# EAGLE board GW-RFM-V40-Mini007-ok6 (EAGLE 7.6.0)
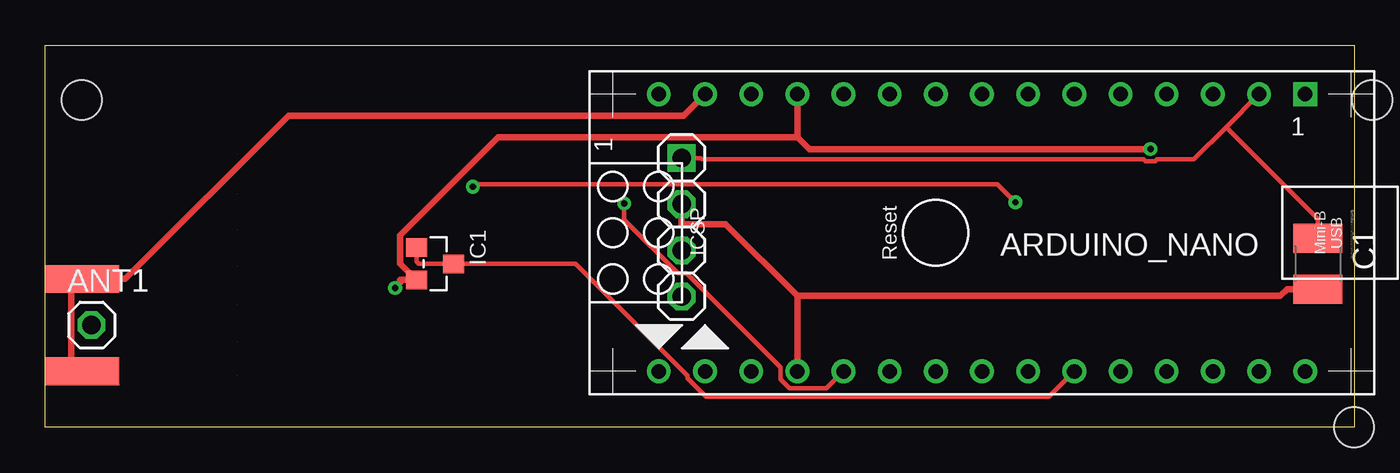
[diagram p0: board, top side]
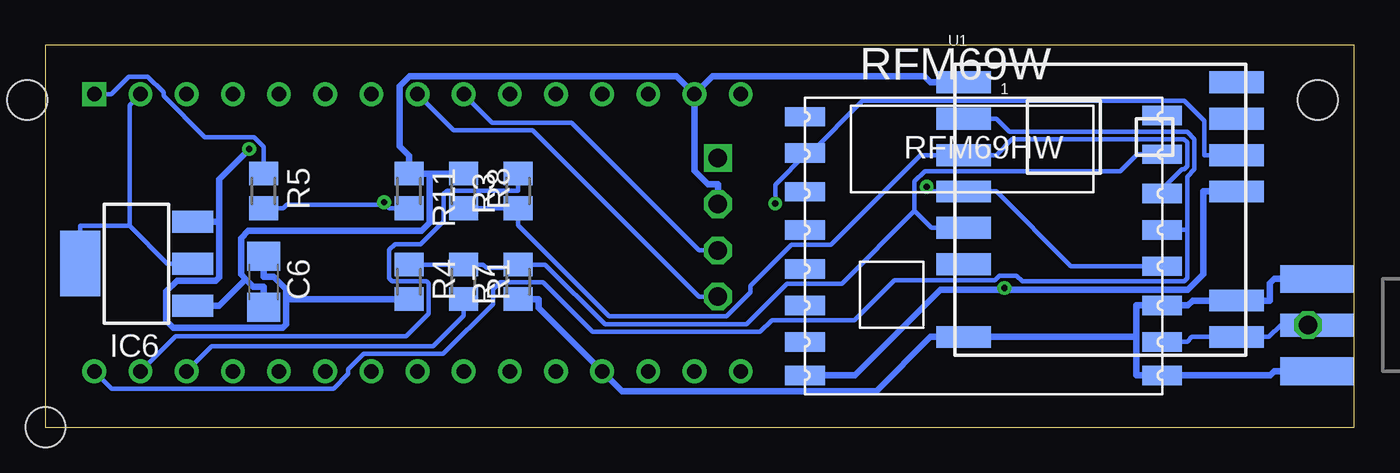
[diagram p1: board, bottom side, seen from below]

Size 72 x 21 mm. Coordinates in mm from the lower left corner, seen from the top.
Outline: 0,0 0,21 72,21 72,0 0,0
Copper layers (1*16): Top 0.035mm / dielectric 1.5mm / Bottom 0.035mm
Design rules "default": minimum track width 6mil, minimum drill 0.35mm, track to track 6mil, track to pad 6mil, pad to pad 6mil, via to via 6mil, smd to smd 6mil, copper to edge 40mil, drill to drill 6mil, minimum pad ring 10mil, minimum via ring 8mil, stop-mask expansion 4mil, vias tented up to drill 0mil, thermal gap 10mil
Net classes: 0 default: width 0.254 mm; 1 Power: width 0.356 mm
Holes 2.2 mm at 2,18 72,0 73,18

## Footprints (pad centres in the part's own frame; a part is rotated, then mirrored left to right if it is on the bottom)
1X01 = drill 1.016 octagon: 1 0,0
ARDUINO_NANO = drill 0.8 square: 1 -20.32,-7.62 | drill 0.8: 2 -17.78,-7.62; 3 -15.24,-7.62; 4 -12.7,-7.62; 5 -10.16,-7.62; 6 -7.62,-7.62; 7 -5.08,-7.62; 8 -2.54,-7.62; 9 0,-7.62; 10 2.54,-7.62; 11 5.08,-7.62; 12 7.62,-7.62; 13 10.16,-7.62; 14 12.7,-7.62; 15 15.24,-7.62; 16 15.24,7.62; 17 12.7,7.62; 18 10.16,7.62; 19 7.62,7.62; 20 5.08,7.62; 21 2.54,7.62; 22 0,7.62; 23 -2.54,7.62; 24 -5.08,7.62; 25 -7.62,7.62; 26 -10.16,7.62; 27 -12.7,7.62; 28 -15.24,7.62; 29 -17.78,7.62; 30 -20.32,7.62
C1210 = smd 1.6 x 2.7: 1 -1.4,0; 2 1.4,0
C1206 = smd 1.6 x 1.8: 1 -1.4,0; 2 1.4,0
SOT23 = smd 1.016 x 1.143: 1 -0.889,-1.016; 2 0.889,-1.016; 3 0,1.016
SOT223 = smd 1.219 x 2.235: 1 -2.311,-3.099; 2 0,-3.099; 3 2.311,-3.099 | smd 3.6 x 2.2: TAB 0,3.099
1X04-S = drill 1.016 square: 1 -3.81,0 | drill 1.016 octagon: 2 -1.27,0; 3 1.27,0; 4 3.81,0
M0805 = smd 1.3 x 1.6: 1 -0.95,0; 2 0.95,0
RFM = smd 2.184 x 1.067: ANT 19.651,2.889; DIO0 0,13.27; DIO1 0,11.143; DIO2 0,9.047; DIO3 0,6.889; DIO4 0,4.889; DIO5 0,2.889; GNDA 19.651,4.889; GNDB 19.651,1.048; MISO 19.651,9.047; MOSI 19.651,11.047; NC 19.651,15.334; NSS 19.651,13.206; RESET 0,15.27; SCK 19.651,7.048; VCC 0,1.048
RFM69HCW-XXXS2 = smd 3 x 1.2: 3.3V 7.5,1; ANT 7.5,-7; DIO0 7.5,3; DIO1 7.5,5; DIO2 7.5,7; GND_1 7.5,-5; GND_2 -7.5,-7; GND_3 -7.5,7; MISO -7.5,5; MOSI -7.5,3; NSS -7.5,-1; RESET -7.5,-3; SCK -7.5,1
SMA_EDGELAUNCH = smd 4.064 x 1.524: GND@1 2.032,-2.54; GND@2 2.032,2.54 | smd 4.064 x 1.524 bottom: GND@3 2.032,2.54; GND@4 2.032,-2.54 | smd 4.064 x 1.27: P 2.032,0

## Placement (x,y rotation side)
ANT1  [1X01]  2.54,5.62 0 top
ARDUINO_NANO  [ARDUINO_NANO]  48.99,10.7 180 top
C1  10uF  [C1210]  70,9 270 top
C6  0.1uF  [C1206]  60,8 270 bottom
IC1  ATSHA204A  [SOT23]  21.44,8.99 270 top
IC6  LM1117MPX-ADJ  [SOT223]  67,9 90 bottom
JP17  [1X04-S]  35,11 270 top
R1  4K7  [M0805]  49,8 270 bottom
R3  4K7  [M0805]  46,13 90 bottom
R4  10k  [M0805]  52,8 270 bottom
R5  4K7  [M0805]  60,13 270 bottom
R7  10K  [M0805]  46,8 90 bottom
R8  10K  [M0805]  49,13 270 bottom
R11  10K  [M0805]  52,13 270 bottom
RFM69W  RFM69HW  [RFM]  30.21,1.81 0 bottom
U1  RFM69HCW  [RFM69HCW-XXXS2]  13.97,11.97 0 bottom
X2  [SMA_EDGELAUNCH]  0,5.62 180 bottom

## Library data of the parts
ANT1 = pinhead
ARDUINO_NANO = ArduinoNanoV30
C1 C6 R1 R3-R5 R7 R8 R11 = rcl
IC1 = Sensor
IC6 = lm1117
JP17 = pinhead-2
RFM69W = hoperf
U1 = doug
X2 = adafruit

## Nets
3V3: ARDUINO_NANO.2 C1.1 IC6.2 IC6.TAB JP17.1
A0: ARDUINO_NANO.4
A1: ARDUINO_NANO.5
A2: ARDUINO_NANO.6
A3: ARDUINO_NANO.7
A4: ARDUINO_NANO.8 JP17.4
A5: ARDUINO_NANO.9 JP17.3
A6: ARDUINO_NANO.10
A7: ARDUINO_NANO.11
ANT: ANT1.1 RFM69W.ANT U1.ANT X2.P
CSN: R1.1 R4.1 R7.2 RFM69W.NSS U1.NSS
D3: ARDUINO_NANO.21
D4: ARDUINO_NANO.22
D5: ARDUINO_NANO.23
D6: ARDUINO_NANO.24
D7/ATSHA: ARDUINO_NANO.25 IC1.1 IC1.3
D8: ARDUINO_NANO.26
D9: ARDUINO_NANO.27
GND [Power]: ARDUINO_NANO.14 ARDUINO_NANO.19 C1.2 C6.2 IC6.1 JP17.2 R7.1 R8.1 R11.1 RFM69W.GNDA RFM69W.GNDB U1.GND_1 U1.GND_2 U1.GND_3 X2.GND@1 X2.GND@2 X2.GND@3 X2.GND@4
IRQ: ARDUINO_NANO.20 RFM69W.DIO0 U1.DIO0
MISO: ARDUINO_NANO.30 RFM69W.MISO U1.MISO
MOSI: R3.1 R8.2 RFM69W.MOSI U1.MOSI
N$5: ARDUINO_NANO.1 R5.1
N$8: ARDUINO_NANO.28 R1.2
N$9: ARDUINO_NANO.29 R3.2
N$12: U1.DIO2
N$13: U1.RESET
N$15: U1.DIO1
N$16: ARDUINO_NANO.3
N$22: ARDUINO_NANO.18
RESET: ARDUINO_NANO.13
RW: ARDUINO_NANO.15
RX: ARDUINO_NANO.17
SCK: R5.2 R11.2 RFM69W.SCK U1.SCK
TX: ARDUINO_NANO.16
VCC [Power]: ARDUINO_NANO.12 C6.1 IC1.2 IC6.3 R4.2 RFM69W.VCC U1.3.3V

## Tracks (layer width: path | path; a pad name or v marks a point on that pad's centre or on a via)
3V3
  Top 0.254: 64.97,16.52 63.18,14.73 61.16,14.73 61.07,14.64 60.52,14.64 60.43,14.73 36.12,14.73 36.04,14.81 JP17.1 | ARDUINO_NANO.2 64.97,16.52 | 64.97,16.52 70,11.48 C1.1
  Bottom 0.254: 67.38,11.08 65.3,9 IC6.2 | 67.38,11.08 70.1,11.08 IC6.TAB | 67.38,11.08 67.38,17.71 ARDUINO_NANO.2
A4
  Bottom 0.254: JP17.4 36.04,7.19 45.2,16.35 49.56,16.35 ARDUINO_NANO.8
A5
  Bottom 0.254: JP17.3 36.04,9.73 43.06,16.75 47.42,16.75 ARDUINO_NANO.9
ANT  (1 unrouted)
  Bottom 0.254: RFM69W.ANT 9.19,4.7 8.92,4.97 U1.ANT 4.69,4.97 4.04,5.62 ANT1.1 X2.P
CSN  (1 unrouted)
  Bottom 0.254: 24.18,11.9 24.18,13.52 23.61,14.09 12.86,14.09 11.93,15.02 RFM69W.NSS | 24.18,11.9 23.25,10.97 U1.NSS | 24.18,11.9 28.19,7.89 31.19,7.89 33.42,5.66 41.21,5.66 44.51,8.95 R7.2 46,8.77 47.74,8.77 47.92,8.95 R1.1 R4.1
D7/ATSHA
  Top 0.254: ARDUINO_NANO.25 55.21,1.68 36.35,1.68 35.34,2.7 35.34,2.83 29.18,8.99 IC1.3 20.53,8.99 20.42,9.09 IC1.1
GND  (2 unrouted)
  Top 0.356: 41.37,7.23 67.95,7.23 68.32,7.6 C1.2 | 41.37,7.23 37.43,11.18 35,11.18 JP17.2 | 41.37,7.23 ARDUINO_NANO.19 | ARDUINO_NANO.14 35.12,17.15 13.38,17.15 4.39,8.16 X2.GND@1 1.41,7.54 1.41,3.7 X2.GND@2
  Bottom 0.356: ARDUINO_NANO.14 35.29,19.32 23.65,19.32 23.3,18.97 U1.GND_3 | ARDUINO_NANO.14 37.28,19.32 51.96,19.32 52.52,18.75 52.52,15.45 52,14.93 R11.1 50.86,13.95 | R7.1 44.87,7.05 44.87,6.58 ARDUINO_NANO.19 40.27,1.98 26.29,1.98 23.3,4.97 U1.GND_2 19.64,4.97 11.98,4.97 | X2.GND@1 4.39,8.16 4.64,7.91 4.64,6.97 U1.GND_1 8.87,6.97 9.14,6.7 RFM69W.GNDA 11.98,6.7 11.98,4.97 | JP17.2 35,13.36 35.55,13.36 36.29,14.11 ARDUINO_NANO.14 | 60.99,8.15 60.56,7.73 60,7.73 C6.2 | 50.86,13.95 50.86,11.24 51.3,10.8 60.84,10.8 61.24,10.39 61.24,8.41 60.99,8.15 | 60.99,8.15 62.45,6.69 IC6.1 | 50.86,13.95 50,13.95 R8.1 | 11.98,4.97 11.98,2.86 RFM69W.GNDB 4.62,2.86 4.39,3.08 X2.GND@2
IRQ  (via drill 0.35 pad 0.76)
  Top 0.254: v31.85,12.31 31.85,11.41 34.79,8.46 35.28,8.46 40.44,3.3 40.44,2.65 40.94,2.15 42.98,2.15 ARDUINO_NANO.20
  Bottom 0.254: 29.92,15.08 30.12,15.08 31.85,13.35 v31.85,12.31 | 29.92,15.08 RFM69W.DIO0 | 29.92,15.08 27.04,17.96 9.35,17.96 8.25,16.86 8.25,14.97 U1.DIO0
MISO  (1 unrouted)
  Bottom 0.254: 9.19,13.79 8.78,14.2 8.78,15.84 9.18,16.25 18.97,16.25 19.69,16.97 21.34,16.97 U1.MISO | 9.19,13.79 | 9.19,13.79 9.19,10.86 | 9.19,10.86 9.19,8.2 9.35,8.03 18.25,8.03 18.57,8.35 19.51,8.35 19.77,8.09 25.29,8.09 27.49,5.89 32.04,5.89 32.67,5.25 41.89,5.25 44.62,7.98 46.98,7.98 47.38,7.58 47.38,6.78 50.12,4.04 54.5,4.04 55.34,3.2 55.34,2.93 56.14,2.13 68.36,2.13 ARDUINO_NANO.30 | RFM69W.MISO 9.19,10.86
MOSI  (1 unrouted)
  Bottom 0.254: RFM69W.MOSI 10.56,13.12 9.47,14.2 9.35,14.2 9.19,14.37 9.19,15.68 9.35,15.84 18.82,15.84 19.69,14.97 U1.MOSI 23.87,14.97 28.79,10.04 30.96,10.04 33.22,7.78 33.22,7.42 34.53,6.11 40.99,6.11 46,11.12 R3.1 47.92,12.05 R8.2
N$5
  Bottom 0.254: R5.1 60,14.88 60,15.43 60.52,15.96 63.23,15.96 65.5,18.23 65.5,18.41 66.38,19.29 67.41,19.29 68.38,18.32 ARDUINO_NANO.1
N$8
  Bottom 0.254: ARDUINO_NANO.28 62.86,4.45 50.67,4.45 49,6.12 R1.2
N$9
  Bottom 0.254: R3.2 46,13.02 49.91,13.02 50.1,12.83 50.1,11.34 51.36,10.08 52.76,10.08 53.08,9.75 53.08,8.18 52.92,8.02 51.03,8.02 50.92,7.91 50.92,6.25 52.16,5.01 64.84,5.01 ARDUINO_NANO.29
SCK  (via drill 0.35 pad 0.76)  (1 unrouted)
  Top 0.254: v53.37,12.38 52.39,13.36 23.64,13.36 v23.51,13.23
  Bottom 0.254: RFM69W.SCK 15.58,8.86 19.69,12.97 U1.SCK 22.26,12.97 23.25,12.97 23.26,12.97 v23.51,13.23 | 53.37,12.23 58.74,12.23 58.92,12.05 R5.2 | 53.37,12.23 53.26,12.23 53.08,12.05 R11.2 | v53.37,12.38 53.37,12.23
VCC  (via drill 0.35 pad 0.76)
  Top 0.356: 41.37,15.96 24.91,15.96 19.52,10.57 19.52,9 IC1.2 19.52,8.1 19.52,7.95 v19.24,7.66 | v60.8,15.3 42.03,15.3 41.37,15.96 | 41.37,15.96 ARDUINO_NANO.12
  Bottom 0.356: 19.24,7.57 9.15,7.57 8.3,8.43 8.3,12.97 U1.3.3V | RFM69W.VCC 27.47,2.86 22.75,7.57 19.24,7.57 | 19.24,7.57 v19.24,7.66 | v60.8,15.3 62.45,13.64 62.45,11.31 | 58.76,7.05 58.76,7.59 59.44,8.27 60,8.27 C6.1 | 62.45,11.31 62.45,8.25 62.65,8.06 64.76,8.06 65.35,7.47 65.35,5.85 64.97,5.47 58.94,5.47 58.76,5.66 58.76,7.05 | 58.76,7.05 53.13,7.05 R4.2 | IC6.3 62.45,11.31